# EAGLE board simpleCH552_finished (EAGLE 9.6.2)
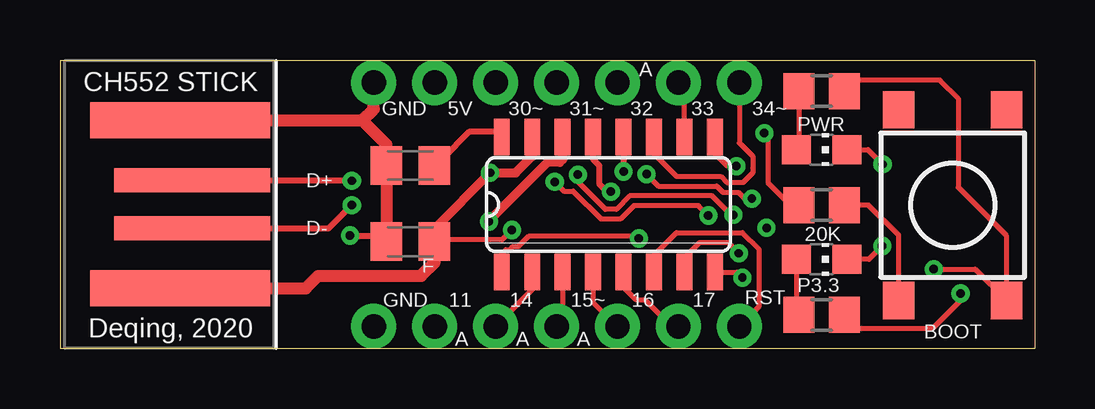
[diagram p0: board, top side]
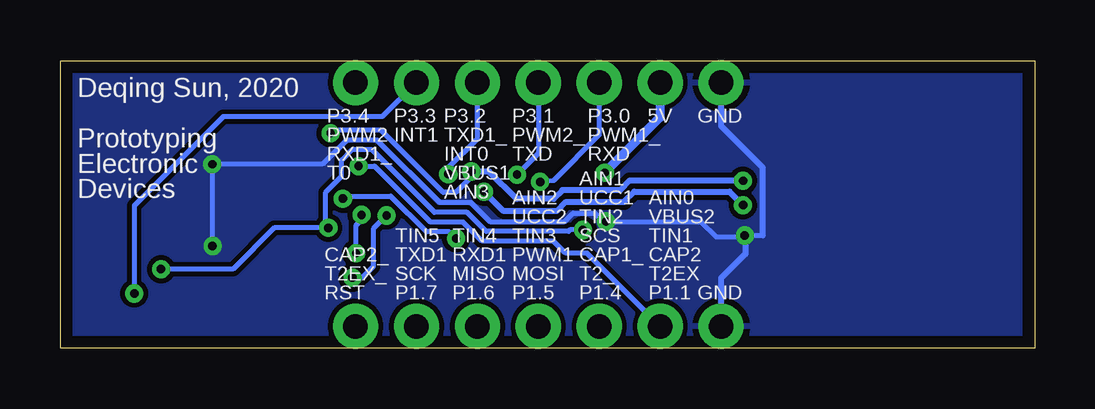
[diagram p1: board, bottom side, seen from below]

Size 40.64 x 11.99 mm. Coordinates in mm from the lower left corner, seen from the top.
Outline: 0,0 40.64,0 40.64,11.99 0,11.99 0,0
Copper layers (1*16): Top 0.035mm / dielectric 1.5mm / Bottom 0.035mm
Design rules "eagleRules10Mil *": minimum track width 8mil, minimum drill 0.3mm, track to track 8mil, track to pad 8mil, pad to pad 8mil, via to via 8mil, smd to smd 8mil, copper to edge 20mil, drill to drill 20mil, minimum pad ring 10mil, minimum via ring 8mil, stop-mask expansion 4mil, vias tented up to drill 14mil, thermal gap 10mil

## Footprints (pad centres in the part's own frame; a part is rotated, then mirrored left to right if it is on the bottom)
C0805K = smd 1.3 x 1.6: 1 -1,0; 2 1,0
1X07_NO_SILK = drill 1.016 pad 1.88: 1 0,0; 2 2.54,0; 3 5.08,0; 4 7.62,0; 5 10.16,0; 6 12.7,0; 7 15.24,0
CHIP-LED0805 = smd 1.2 x 1.2: A 0,-1.05; C 0,1.05
R0805 = smd 1.3 x 1.5: 1 -0.95,0; 2 0.95,0
TACTILE_SWITCH_SMD_6.2MM_TALL = smd 1.55 x 1.3: A1 -3.975,-2.25; A2 3.975,-2.25; B1 -3.975,2.25; B2 3.975,2.25
MY_IC_SO16 = smd 0.66 x 1.524: 1 -4.445,-2.819; 2 -3.175,-2.819; 3 -1.905,-2.819; 4 -0.635,-2.819; 5 0.635,-2.819; 6 1.905,-2.819; 7 3.175,-2.819; 8 4.445,-2.819; 9 4.445,2.819; 10 3.175,2.819; 11 1.905,2.819; 12 0.635,2.819; 13 -0.635,2.819; 14 -1.905,2.819; 15 -3.175,2.819; 16 -4.445,2.819
USB-A-PCB = smd 7.5 x 1.5: 5V -0.2,-3.5; GND -0.2,3.5 | smd 6.5 x 1: USB_M 0.3,-1; USB_P 0.3,1

## Placement (x,y rotation side)
C1  0.1uF  [C0805K]  14.61,4.45 180 top
C2  0.1uF  [C0805K]  14.61,7.62 180 top
J1  [1X07_NO_SILK]  13.08,0.91 0 top
J2  [1X07_NO_SILK]  13.08,11.07 0 top
LED1  RED  [CHIP-LED0805]  31.75,8.28 270 top
LED2  GREEN  [CHIP-LED0805]  31.75,3.71 270 top
R1  20K  [R0805]  31.75,5.97 0 top
R2  20K  [R0805]  31.75,10.72 180 top
R3  20K  [R0805]  31.75,1.4 180 top
S1  MOMENTARY-SWITCH-SPST-SMD-6.2MM-TALL  [TACTILE_SWITCH_SMD_6.2MM_TALL]  37.21,5.97 270 top
U1  CH552G  [MY_IC_SO16]  22.86,5.99 0 top
X1  USBPCB  [USB-A-PCB]  5.21,5.99 0 top

## Library data of the parts
C1 C2 = rcl; LCSC: C16834; SPICEPREFIX: C
J1 J2 = SparkFun-Connectors
LED1 LED2 = led
R1-R3 = rcl; SPICEPREFIX: R
S1 = SparkFun-Switches; PROD_ID: SWCH-11966; SF_SKU: COM-12992
U1 = myOwnLib; LCSC: C111292
X1 = SparkFun

## Nets
3.3V: C2.1 U1.16
+5V: C1.1 J2.2 R2.1 S1.B2 U1.15 X1.5V
GND: C1.2 C2.2 J1.1 J2.1 LED1.C LED2.C U1.14 X1.GND
N$1: R1.2 S1.A2
N$2: LED1.A R2.2
N$3: LED2.A R3.2
P1.1: J1.2 U1.9
P1.4: J1.3 U1.2
P1.5: J1.4 U1.3
P1.6: J1.5 U1.4
P1.7: J1.6 U1.5
P3.0: J2.3 U1.8
P3.1: J2.4 U1.7
P3.2: J2.5 U1.1
P3.3: J2.6 R3.1 U1.10
P3.4: J2.7 U1.11
RST: J1.7 U1.6
USB_D+: R1.1 U1.12 X1.USB_P
USB_D-: U1.13 X1.USB_M

## Tracks (layer width: path | path; a pad name or v marks a point on that pad's centre or on a via)
3.3V
  Top 0.254: U1.16 18.21,9.02 17.05,9.02 15.96,7.92 C2.1
+5V  (via drill 0.35)
  Top 0.203: v18.84,4.93 18.43,4.52 15.68,4.52 C1.1 | R2.1 33.16,11.18 36.68,11.18 37.44,10.41 37.44,6.71 39.46,4.68 S1.B2 38.15,3.3 v36.42,3.3
  Top 0.381: U1.15 19.68,8 19,7.32 v17.93,7.32 15.61,4.99 C1.1
  Top 0.508: X1.5V 10.24,2.49 10.77,3.02 15.06,3.02 15.61,3.56 C1.1
  Bottom 0.203: v18.84,4.93 19.39,4.93 19.44,4.88 22.88,4.88 23.66,5.66 25.02,5.66 27.63,8.27 28.48,8.27 28.91,7.84 28.91,7.16 29.57,6.5 29.57,5.33 29.45,5.22 v29.45,5.02 31.71,5.02 33.43,3.3 v36.42,3.3
  Bottom 0.381: J2.2 15.62,9.63 v17.93,7.32
GND  (via drill 0.35)
  Top 0.203: LED1.C 33.68,8.28 v34.29,7.67 | v34.28,4.27 33.72,3.71 LED2.C
  Top 0.254: v12.09,4.7 13.35,4.7 C1.2
  Top 0.381: v17.88,5.28 17.88,5.31 20.32,7.75 20.83,7.75 20.95,7.87 U1.14
  Top 0.508: J2.1 13.08,9.97 12.6,9.49 | X1.GND 12.6,9.49 | 12.6,9.49 13.61,8.49 C2.2 C1.2
  Bottom 0.203: 11.35,4.7 12.06,4.7 12.12,4.65 13.28,4.65 13.92,5.28 v17.88,5.28 17.98,5.28 18.34,5.64 19.25,5.64 19.61,5.28 22.71,5.28 23.5,6.07 24.81,6.07 27.41,8.68 28.68,8.68 29.69,7.67 v34.29,7.67 v34.29,4.28 v34.28,4.27
  Bottom 0.254: J2.1 13.08,9.27 11.35,7.54 11.35,4.7 | J1.1 13.08,2.92 12.06,3.94 12.06,4.7
  pour Bottom: 0,0 40.64,0 40.64,11.99 0,11.99
N$1
  Top 0.203: S1.A2 34.96,4.71 33.71,5.97 R1.2
N$2
  Top 0.203: R2.2 30.8,8.38 LED1.A
N$3
  Top 0.203: LED2.A 30.7,1.5 R3.2
P1.1  (via drill 0.35)
  Top 0.203: v28.19,7.59 27.82,7.59 27.28,8.13 27.28,8.79 U1.9
  Bottom 0.203: J1.2 18.67,3.96 19.56,3.96 20.07,4.47 23.04,4.47 23.83,5.26 25.19,5.26 27.52,7.59 v28.19,7.59
P1.4
  Top 0.203: U1.2 19.68,2.44 J1.3
P1.5
  Top 0.203: U1.3 20.95,1.17 J1.4
P1.6
  Top 0.203: U1.4 22.23,1.93 J1.5
P1.7
  Top 0.203: U1.5 23.5,2.54 24,2.03 24.38,2.03 25.32,1.09 25.6,1.09 J1.6
P3.0  (via drill 0.35)
  Top 0.203: v20.62,6.93 21.01,6.55 21.4,6.55 22.56,5.38 23.36,5.38 23.92,5.94 26.62,5.94 v27.03,5.54 | U1.8 28.22,3.17 v28.45,2.95
  Bottom 0.203: J2.3 18.16,8.89 20.07,6.99 v20.62,6.93 | v28.45,2.95 28.04,2.95 27.58,3.4 27.58,4.98 v27.03,5.54
P3.1  (via drill 0.35)
  Top 0.203: v21.59,7.24 21.59,6.93 22.73,5.79 23.19,5.79 23.75,6.35 27.18,6.35 27.97,5.56 v28.07,5.56 | U1.7 26.04,3.79 26.67,4.42 27.84,4.42 v28.3,3.96
  Bottom 0.203: J2.4 20.7,8.13 v21.59,7.24 | v28.3,3.96 28.3,5.13 28.07,5.36 v28.07,5.56
P3.2  (via drill 0.35)
  Top 0.203: U1.1 18.41,3.94 18.59,4.12 18.75,4.12 18.89,4.25 19.12,4.25 19.56,4.68 24.02,4.68 v24.13,4.58 | v24.45,7.26 24.96,6.76 27.38,6.76 27.64,6.5 28.29,6.5 28.55,6.24 v28.85,6.24
  Bottom 0.203: J2.5 23.24,8.74 24.45,7.52 v24.45,7.26 | v24.13,4.58 24.41,4.85 25.36,4.85 26.85,6.34 28.74,6.34 v28.85,6.24
P3.3  (via drill 0.35)
  Top 0.203: U1.10 26.04,10.82 J2.6 | v37.54,2.29 37.54,1.98 36.37,0.81 33.28,0.81 R3.1
  Bottom 0.203: J2.6 27.2,9.65 33.83,9.65 37.54,5.94 v37.54,2.29
P3.4
  Top 0.203: U1.11 24.77,8.1 25.7,7.16 27.55,7.16 27.8,6.91 27.91,6.91 28.48,6.91 28.87,7.3 28.88,7.31 28.88,7.52 28.88,8 28.32,8.56 J2.7
RST
  Top 0.203: U1.6 24.77,3.89 25.7,4.83 28.45,4.83 29.13,4.14 29.13,1.72 J1.7
USB_D+  (via drill 0.35)
  Top 0.203: v29.36,8.97 29.52,8.81 29.52,6.91 30.45,5.97 R1.1
  Top 0.254: U1.12 v23.5,7.37 | v12.17,6.99 X1.USB_P
  Bottom 0.203: v23.5,7.37 23.5,7.14 24.13,6.5 24.66,6.5 27.25,9.09 29.24,9.09 v29.36,8.97
  Bottom 0.254: v23.5,7.37 22.75,7.37 21.6,6.22 20.07,6.22 19.7,6.59 17.29,6.59 16.89,6.99 v12.17,6.99
USB_D-  (via drill 0.35)
  Top 0.254: X1.USB_M 11.19,4.99 v12.17,5.97 | U1.13 22.23,7.87 22.48,7.62 22.48,6.86 22.81,6.53 v22.96,6.53
  Bottom 0.203: 17.18,6.1 17.13,6.1
  Bottom 0.254: 17.18,6.1 19.54,6.1 19.93,5.71 22.15,5.71 v22.96,6.53 | v12.17,5.97 12.72,6.53 16.7,6.53 17.13,6.1

## Text on the board
tNames: CH552 STICK | A | GND | 5V | 30~ | 31~ | 32 | 33 | 34~ | PWR | D+ | D- | 20K | F | GND | 11 | 14 | 15~ | 16 | 17 | RST | P3.3 | Deqing, 2020 | A | A | A | BOOT
bNames: GND | 5V | P3.0 / PWM1_ / RXD | P3.1 / PWM2_ / TXD | P3.2 / TXD1_ / INT0 / VBUS1 / AIN3 | P3.3 / INT1 | P3.4 / PWM2 / RXD1_ / T0 | Deqing Sun, 2020 / / Prototyping / Electronic / Devices | GND | AIN0 / VBUS2 / TIN1 / CAP2 / T2EX / P1.1 | AIN1 / UCC1 / TIN2 / SCS / CAP1_ / T2_ / P1.4 | AIN2 / UCC2 / TIN3 / PWM1 / MOSI / P1.5 | TIN4 / RXD1 / MISO / P1.6 | TIN5 / TXD1 / SCK / P1.7 | CAP2_ / T2EX_ / RST